# Altium PCB Hi-V H-Bridge v0.1.0.PCBDOC
Units mm, origin at the board's own origin, x right, y up, seen from the top; angles counter-clockwise.
Board outline 152.4 x 152.4 mm, 2 copper layers (Top Layer, Bottom Layer); 84 components, 9 nets, 144 pads, 0 vias.
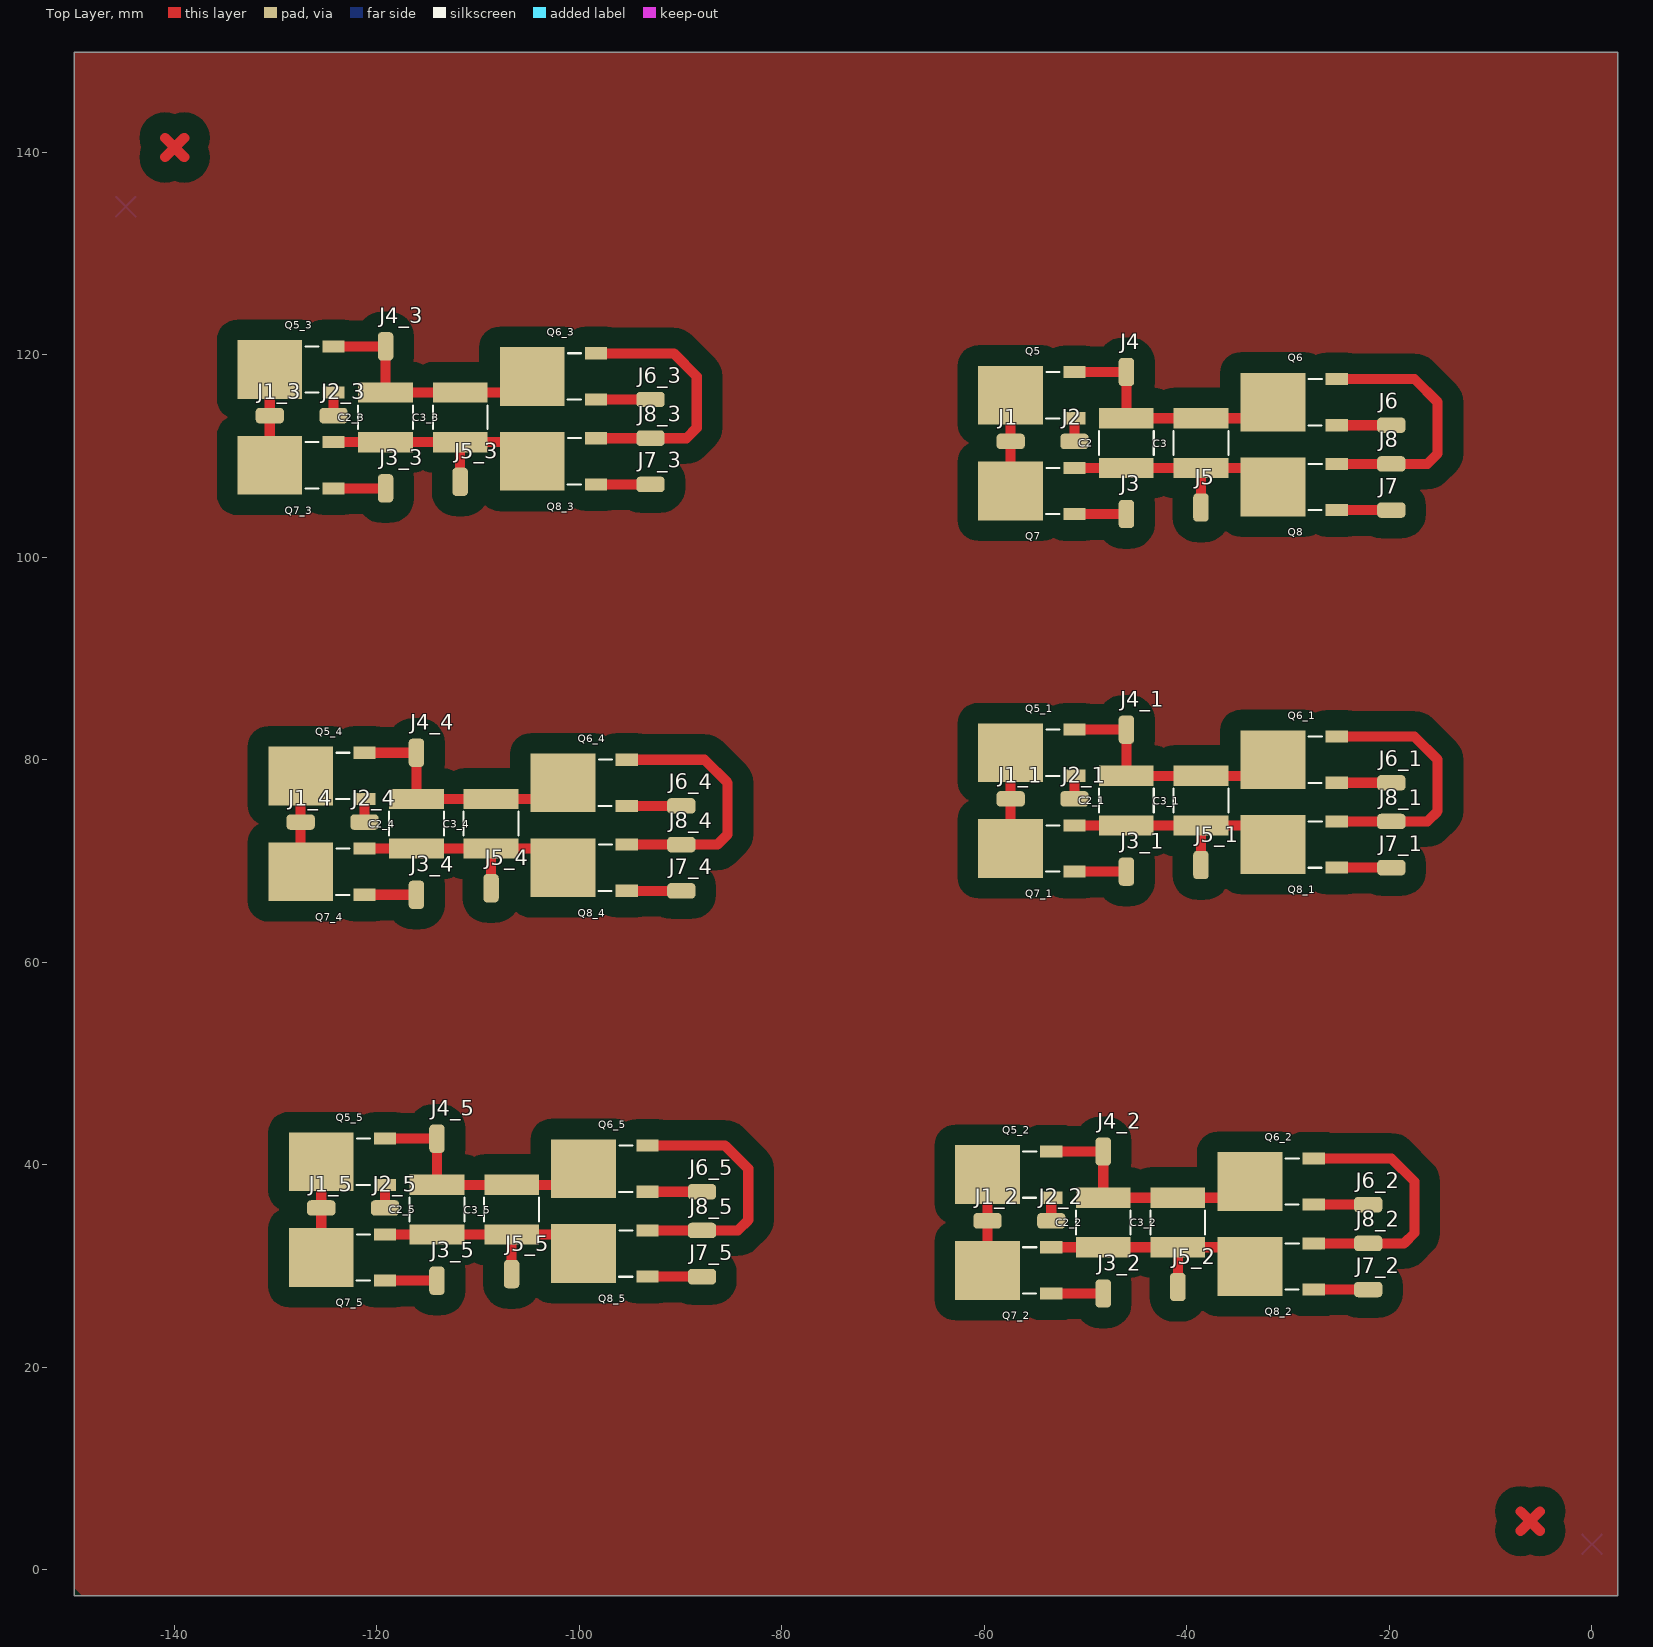
[diagram p0: Top Layer view]
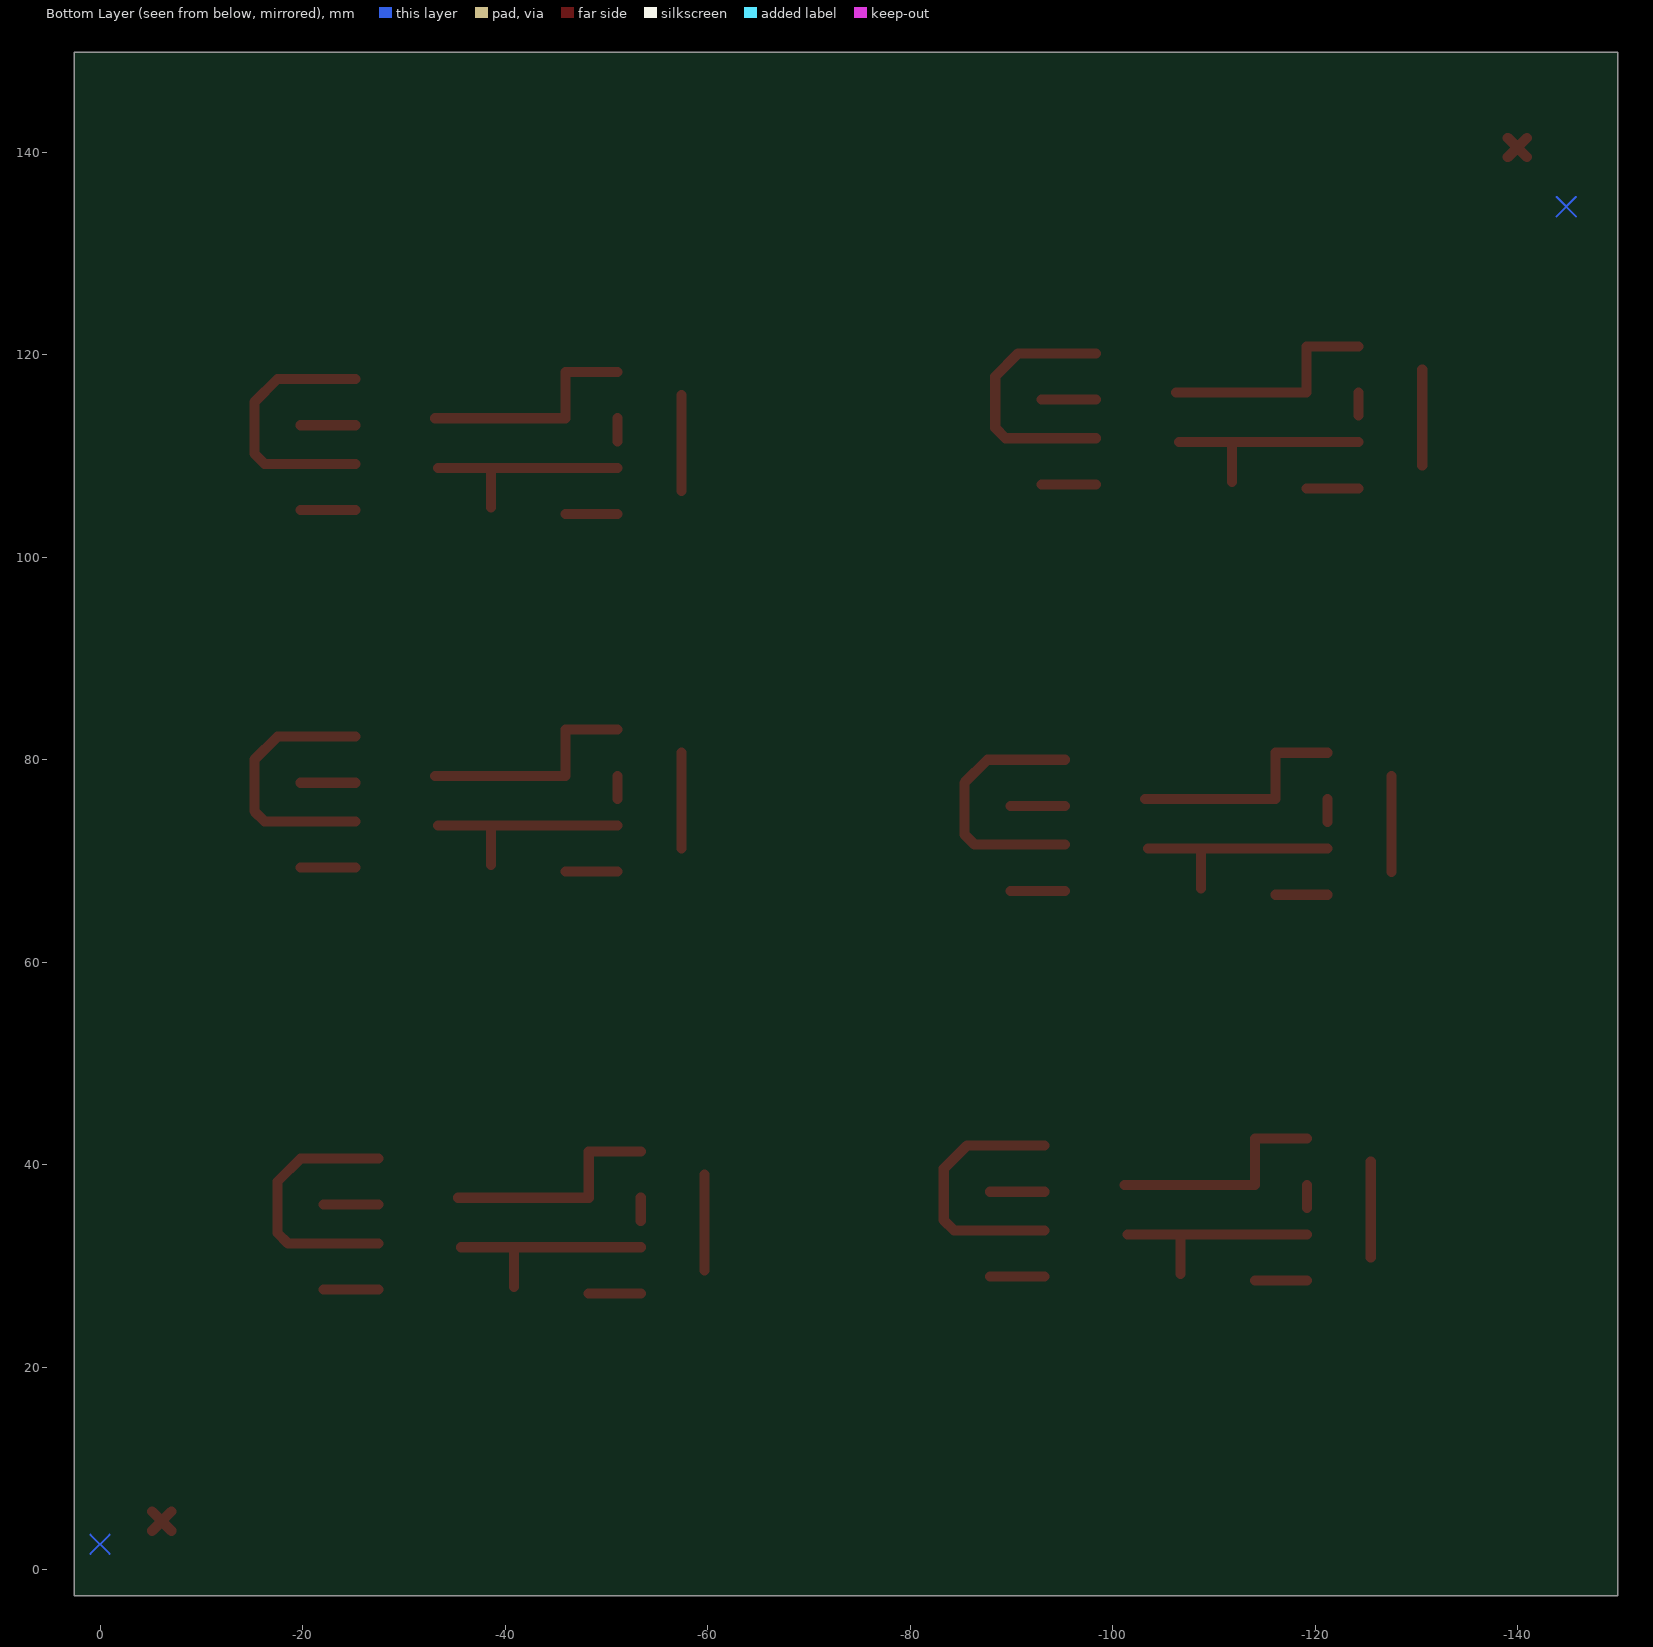
[diagram p1: Bottom Layer view, seen from below]
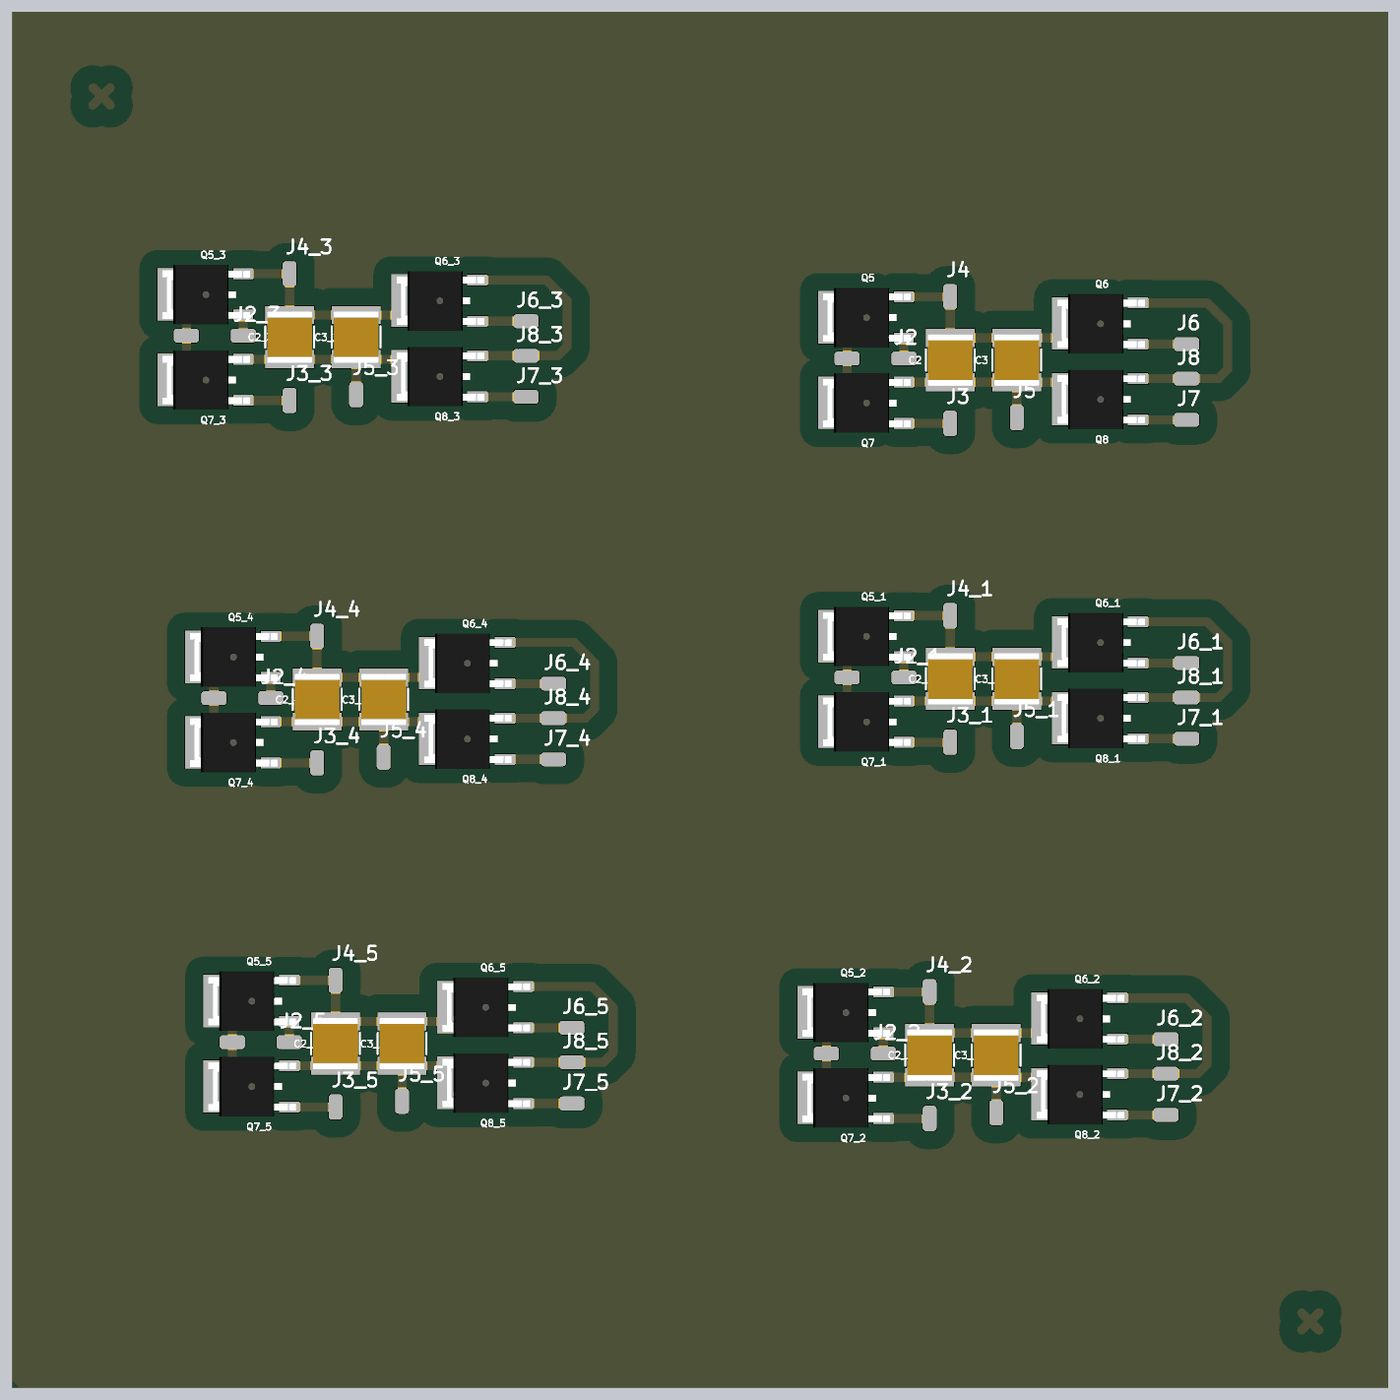
[diagram p2: 3D render of the assembled board from above, using the file's embedded part models]

## Layer stack, top to bottom
Top Solder: solder mask 0.0102, Solder Resist, Dk 3.5
Top Layer: signal copper 0.0356
Dielectric1: core 0.32, FR-4, Dk 4.8
Bottom Layer: signal copper 0.0356
Bottom Solder: solder mask 0.0102, Solder Resist, Dk 3.5

## Board outline
-149.86,-2.54 -149.86,149.86 2.54,149.86 2.54,-2.54

## Design rules (kind name [scope] priority, off if disabled: settings)
AssemblyTestpoint [All] p1: testpointundercomponent=TRUE minsize=1.016 maxsize=2.54 preferedsize=1.524 minholesize=0 maxholesize=1.016 preferedholesize=0.813 testpointgrid=0.025 usegrid=FALSE gridtolerance=0 allowsidebottom=TRUE
Clearance "Clearance Grounds" [InNetClass('Grounds') vs InNetClass('Grounds')] p1: gap=-0.025 ignorepadtopadclearanceinfootprint=FALSE except(0: Arc-Hole Track-Hole SMDPad-Hole THPad-Hole Via-Hole Fill-Hole Poly-Hole Region-Hole Text-Hole)
Clearance "High Voltage (171-250V) Clearance" [InNetClass('171-250V')] p2: gap=2 ignorepadtopadclearanceinfootprint=FALSE
Clearance "Tracks -VT1.P" [InNet('-VT1.P') vs InNet('NetC15A_2')          or InNet('NetNetTie9_1')] p3: gap=-0.025 ignorepadtopadclearanceinfootprint=FALSE except(0: Arc-Hole Track-Hole SMDPad-Hole THPad-Hole Via-Hole Fill-Hole Poly-Hole Region-Hole Text-Hole)
Clearance NetTie3 [InNet('NetNetTie3_1') vs InNet('NetNetTie3_2')] p4: gap=-0.025 ignorepadtopadclearanceinfootprint=FALSE except(0: Arc-Hole Track-Hole SMDPad-Hole THPad-Hole Via-Hole Fill-Hole Poly-Hole Region-Hole Text-Hole)
Clearance NetTie5 [InNet('NetNetTie5_1') vs InNet('NetNetTie5_2')] p5: gap=-0.025 ignorepadtopadclearanceinfootprint=FALSE except(0: Arc-Hole Track-Hole SMDPad-Hole THPad-Hole Via-Hole Fill-Hole Poly-Hole Region-Hole Text-Hole)
Clearance "Tracks +VT1.P" [InNet('+VT1.P') vs InNet('NetC15b_2')  or InNet('NetNetTie8_1')] p6: gap=-0.025 ignorepadtopadclearanceinfootprint=FALSE except(0: Arc-Hole Track-Hole SMDPad-Hole THPad-Hole Via-Hole Fill-Hole Poly-Hole Region-Hole Text-Hole)
Clearance "Tracks -DC Bus" [InNet('-DC BUS') vs InNet('NetNetTie6_1')] p7: gap=-0.025 ignorepadtopadclearanceinfootprint=FALSE except(0: Arc-Hole Track-Hole SMDPad-Hole THPad-Hole Via-Hole Fill-Hole Poly-Hole Region-Hole Text-Hole)
Clearance "Tracks +Vsolar" [InNet('+VSOLAR') vs InNet('NetNetTie7_1')] p8: gap=-0.025 ignorepadtopadclearanceinfootprint=FALSE except(0: Arc-Hole Track-Hole SMDPad-Hole THPad-Hole Via-Hole Fill-Hole Poly-Hole Region-Hole Text-Hole)
Clearance Tracks [All] p9: gap=0.178 ignorepadtopadclearanceinfootprint=FALSE except(0: Arc-Hole Track-Hole SMDPad-Hole THPad-Hole Via-Hole Fill-Hole Poly-Hole Region-Hole Text-Hole)
ComponentClearance "Fiducials and labels" [HasFootprint('Date Code Label') OR HasFootprint('Fiducial - Top Only') or HasFootprint('1 Pin 14-Gauge Wire Connector') OR HasFootprint('1 Pin 22-Gauge Wire Connector')] p1: gap=-25.4 collisioncheckmode=3 verticalgap=0.127 showdistances=TRUE
ComponentClearance Netties [(ObjectKind = 'Component') And (ComponentType = 'Net Tie')] p2: gap=-25.4 collisioncheckmode=3 verticalgap=0.127 showdistances=TRUE
ComponentClearance "Terminal Blocks" [(HasFootprint('TE 796739-2')) vs (HasFootprint('TE 796739-2'))] p3: gap=-25.4 collisioncheckmode=3 verticalgap=0.127 showdistances=TRUE
ComponentClearance [All] p4: gap=0.127 collisioncheckmode=3 verticalgap=0.127 showdistances=TRUE
FabricationTestpoint [All] p1: side=2 testpointundercomponent=TRUE minsize=1.016 maxsize=2.54 preferedsize=1.524 minholesize=0 maxholesize=1.016 preferedholesize=0.813 testpointgrid=0.025 allowsidebottom=TRUE usegrid=FALSE gridtolerance=0
HoleSize "OSH Park Hole Size" [All] p1: absolutevalues=TRUE maxlimit=25.4 minlimit=0.33 maxpercent=80.000 minpercent=20.000
HoleSize "Sunstone Hole Size" [All] p2: absolutevalues=TRUE maxlimit=6.375 minlimit=0.406 maxpercent=80.000 minpercent=20.000
MinimumAnnularRing [All] p1: minimumring=0.127 // OSH Park
MinimumSolderMaskSliver [(InComponentClass('Inside Board Components'))] p1: minsoldermaskwidth=0
PolygonConnect "Hi-Power Polygon" [InNetClass('15A')] p1: connectstyle=Direct reliefconductorwidth=0.254 reliefentries=4 polygonreliefangle="45 Angle" airgapwidth=0.254
PolygonConnect [All] p2: connectstyle=Relief reliefconductorwidth=0.381 reliefentries=4 polygonreliefangle="90 Angle" airgapwidth=0.254
RoomDefinition "High Voltage H-Bridge - Fixed Copy" [InComponentClass('High Voltage H-Bridge - Fixed Copy')] p1: confinementstyle=ConfineIn formatcopy=TRUE lockcomponents=FALSE outline -152.4,-93.617 -152.4,-91.686 -55.734,-91.686 -55.734,-85.829 -13.21,-85.829 -13.21,-87.76 -51.48,-87.76 -51.48,-88.483 -51.48,-93.617 -148.947,-93.617
RoutingPriority Hi-Power [InNetClass('Hi-Power')] p1: routingpriority=0
RoutingPriority "Non-Hi-Power Tracks" [All] p2: routingpriority=1
RoutingTopology "Analog Routing Topology" [InNet('ANALOG GROUND')] p1: topology=Starburst
RoutingTopology [All] p2: topology=Shortest
RoutingVias "Signal/Power Vias" [All] p1: holewidth=0.406 width=0.66 viastyle="Through Hole" minholewidth=0.406 minwidth=0.66 maxholewidth=0.406 maxwidth=0.66
SMDNeckDown SMDNeckDown_1 [InNetClass('Power')] p1: percent=5000.000
SMDNeckDown [InNetClass('Extreme Hi-Power')] p2: percent=5000.000
ShortCircuit "Ground Short Circuit" [InNetClass('Grounds') vs InNetClass('Grounds')] p1: allowed=TRUE
ShortCircuit "ShortCircuit -VT1.P" [InNet('-VT1.P') vs InNet('NetC15A_2')          or InNet('NetNetTie9_1')] p2: allowed=TRUE
ShortCircuit "ShortCircuit NetTie3" [InNet('NetNetTie3_1') vs InNet('NetNetTie3_2')] p3: allowed=TRUE
ShortCircuit "ShortCircuit NetTie5" [InNet('NetNetTie5_1') vs InNet('NetNetTie5_2')] p4: allowed=TRUE
ShortCircuit "ShortCircuit -0V" [InNet('0V') vs InNet('NetNetTie4_1')] p5: allowed=TRUE
ShortCircuit "ShortCircuit +VT1.P" [InNet('+VT1.P') vs InNet('NetC15b_2')  or InNet('NetNetTie8_1')] p6: allowed=TRUE
ShortCircuit "ShortCircuit -DC Bus" [InNet('-DC BUS') vs InNet('NetNetTie6_1')] p7: allowed=TRUE
ShortCircuit "ShortCircuit C_Vs" [InNet('C_VS') vs InNet('NetC15D_2')] p8: allowed=TRUE
ShortCircuit "ShortCircuit D_Vs" [InNet('D_VS') vs InNet('NetC15C_2')] p9: allowed=TRUE
ShortCircuit "ShortCircuit +Vsolar" [InNet('+VSOLAR') vs InNet('NetNetTie7_1')] p10: allowed=TRUE
ShortCircuit [All] p11: allowed=FALSE
SilkToSilkClearance [All] p1: silktosilkclearance=0
SilkToSolderMaskClearance SilkscreenOverComponentPads [IsPad] p1: minsilkscreentomaskgap=0 clearancetoexposedcopper=TRUE
SolderMaskExpansion Vias [IsVia] p1: expansion=-0.051
SolderMaskExpansion "Everything else" [All] p2: expansion=0.102
Width "High Current Width" [InNetClass('15A')] p1: maxlimit=253.975 minlimit=4.191 preferedwidth=8.382
Width "Signal trace width" [All] p2: maxlimit=253.975 minlimit=1 preferedwidth=1 checkconnectedcopper=TRUE
20 further rules are at their usual default settings.

## Classes and differential pairs
net class 171-250V: GND NetC2_1 NetC2_2 NetJ1_1 NetJ2_1 NetJ3_1 NetJ6_1 NetJ7_1 NetJ8_1
component class "High Voltage H-Bridge - Fixed Copy": C2 C3 J1 J2 J3 J4 J5 J6 J7 J8 Q5 Q6 Q7 Q8

## Components (designator, comment, footprint, x,y, rotation, side; value= is the part's Value field where it differs from the comment)
C2 "1uF 2220 450V" "C2220 - CERAMIC" -45.974,111.273 r270 top
C2_1 "1uF 2220 450V" "C2220 - CERAMIC" -45.974,75.967 r270 top (schematic designator C2)
C2_2 "1uF 2220 450V" "C2220 - CERAMIC" -48.26,34.311 r270 top (schematic designator C2)
C2_3 "1uF 2220 450V" "C2220 - CERAMIC" -119.126,113.813 r270 top (schematic designator C2)
C2_4 "1uF 2220 450V" "C2220 - CERAMIC" -116.078,73.681 r270 top (schematic designator C2)
C2_5 "1uF 2220 450V" "C2220 - CERAMIC" -114.046,35.581 r270 top (schematic designator C2)
C3 "1uF 2220 450V" "C2220 - CERAMIC" -38.608,111.273 r270 top
C3_1 "1uF 2220 450V" "C2220 - CERAMIC" -38.608,75.967 r270 top (schematic designator C3)
C3_2 "1uF 2220 450V" "C2220 - CERAMIC" -40.894,34.311 r270 top (schematic designator C3)
C3_3 "1uF 2220 450V" "C2220 - CERAMIC" -111.76,113.813 r270 top (schematic designator C3)
C3_4 "1uF 2220 450V" "C2220 - CERAMIC" -108.712,73.681 r270 top (schematic designator C3)
C3_5 "1uF 2220 450V" "C2220 - CERAMIC" -106.68,35.581 r270 top (schematic designator C3)
J1 "15VDC" "Breadboard Prototype Pin" -57.404,111.438 r90 top
J1_1 "15VDC" "Breadboard Prototype Pin" -57.404,76.132 r90 top (schematic designator J1)
J1_2 "15VDC" "Breadboard Prototype Pin" -59.69,34.476 r90 top (schematic designator J1)
J1_3 "15VDC" "Breadboard Prototype Pin" -130.556,113.978 r90 top (schematic designator J1)
J1_4 "15VDC" "Breadboard Prototype Pin" -127.508,73.846 r90 top (schematic designator J1)
J1_5 "15VDC" "Breadboard Prototype Pin" -125.476,35.746 r90 top (schematic designator J1)
J2 "15VDC" "Breadboard Prototype Pin" -51.104,111.438 r90 top
J2_1 "15VDC" "Breadboard Prototype Pin" -51.104,76.132 r90 top (schematic designator J2)
J2_2 "15VDC" "Breadboard Prototype Pin" -53.39,34.476 r90 top (schematic designator J2)
J2_3 "15VDC" "Breadboard Prototype Pin" -124.256,113.978 r90 top (schematic designator J2)
J2_4 "15VDC" "Breadboard Prototype Pin" -121.208,73.846 r90 top (schematic designator J2)
J2_5 "15VDC" "Breadboard Prototype Pin" -119.176,35.746 r90 top (schematic designator J2)
J3 "15VDC" "Breadboard Prototype Pin" -45.974,104.263 r0 top
J3_1 "15VDC" "Breadboard Prototype Pin" -45.974,68.957 r0 top (schematic designator J3)
J3_2 "15VDC" "Breadboard Prototype Pin" -48.26,27.301 r0 top (schematic designator J3)
J3_3 "15VDC" "Breadboard Prototype Pin" -119.126,106.803 r0 top (schematic designator J3)
J3_4 "15VDC" "Breadboard Prototype Pin" -116.078,66.671 r0 top (schematic designator J3)
J3_5 "15VDC" "Breadboard Prototype Pin" -114.046,28.571 r0 top (schematic designator J3)
J4 "15VDC" "Breadboard Prototype Pin" -45.974,118.283 r0 top
J4_1 "15VDC" "Breadboard Prototype Pin" -45.974,82.977 r0 top (schematic designator J4)
J4_2 "15VDC" "Breadboard Prototype Pin" -48.26,41.321 r0 top (schematic designator J4)
J4_3 "15VDC" "Breadboard Prototype Pin" -119.126,120.823 r0 top (schematic designator J4)
J4_4 "15VDC" "Breadboard Prototype Pin" -116.078,80.691 r0 top (schematic designator J4)
J4_5 "15VDC" "Breadboard Prototype Pin" -114.046,42.591 r0 top (schematic designator J4)
J5 "15VDC" "Breadboard Prototype Pin" -38.608,104.908 r0 top
J5_1 "15VDC" "Breadboard Prototype Pin" -38.608,69.602 r0 top (schematic designator J5)
J5_2 "15VDC" "Breadboard Prototype Pin" -40.894,27.946 r0 top (schematic designator J5)
J5_3 "15VDC" "Breadboard Prototype Pin" -111.76,107.448 r0 top (schematic designator J5)
J5_4 "15VDC" "Breadboard Prototype Pin" -108.712,67.316 r0 top (schematic designator J5)
J5_5 "15VDC" "Breadboard Prototype Pin" -106.68,29.216 r0 top (schematic designator J5)
J6 "15VDC" "Breadboard Prototype Pin" -19.812,113.036 r90 top
J6_1 "15VDC" "Breadboard Prototype Pin" -19.812,77.73 r90 top (schematic designator J6)
J6_2 "15VDC" "Breadboard Prototype Pin" -22.098,36.074 r90 top (schematic designator J6)
J6_3 "15VDC" "Breadboard Prototype Pin" -92.964,115.576 r90 top (schematic designator J6)
J6_4 "15VDC" "Breadboard Prototype Pin" -89.916,75.444 r90 top (schematic designator J6)
J6_5 "15VDC" "Breadboard Prototype Pin" -87.884,37.344 r90 top (schematic designator J6)
J7 "15VDC" "Breadboard Prototype Pin" -19.812,104.654 r90 top
J7_1 "15VDC" "Breadboard Prototype Pin" -19.812,69.348 r90 top (schematic designator J7)
J7_2 "15VDC" "Breadboard Prototype Pin" -22.098,27.692 r90 top (schematic designator J7)
J7_3 "15VDC" "Breadboard Prototype Pin" -92.964,107.194 r90 top (schematic designator J7)
J7_4 "15VDC" "Breadboard Prototype Pin" -89.916,67.062 r90 top (schematic designator J7)
J7_5 "15VDC" "Breadboard Prototype Pin" -87.884,28.962 r90 top (schematic designator J7)
J8 "15VDC" "Breadboard Prototype Pin" -19.812,109.214 r90 top
J8_1 "15VDC" "Breadboard Prototype Pin" -19.812,73.908 r90 top (schematic designator J8)
J8_2 "15VDC" "Breadboard Prototype Pin" -22.098,32.252 r90 top (schematic designator J8)
J8_3 "15VDC" "Breadboard Prototype Pin" -92.964,111.754 r90 top (schematic designator J8)
J8_4 "15VDC" "Breadboard Prototype Pin" -89.916,71.622 r90 top (schematic designator J8)
J8_5 "15VDC" "Breadboard Prototype Pin" -87.884,33.522 r90 top (schematic designator J8)
Q5 "N-MOSFET - 66A/25V" DPAK -57.404,116.003 r90 top
Q5_1 "N-MOSFET - 66A/25V" DPAK -57.404,80.697 r90 top (schematic designator Q5)
Q5_2 "N-MOSFET - 66A/25V" DPAK -59.69,39.041 r90 top (schematic designator Q5)
Q5_3 "N-MOSFET - 66A/25V" DPAK -130.556,118.543 r90 top (schematic designator Q5)
Q5_4 "N-MOSFET - 66A/25V" DPAK -127.508,78.411 r90 top (schematic designator Q5)
Q5_5 "N-MOSFET - 66A/25V" DPAK -125.476,40.311 r90 top (schematic designator Q5)
Q6 "N-MOSFET - 66A/25V" DPAK -31.496,115.316 r90 top
Q6_1 "N-MOSFET - 66A/25V" DPAK -31.496,80.01 r90 top (schematic designator Q6)
Q6_2 "N-MOSFET - 66A/25V" DPAK -33.782,38.354 r90 top (schematic designator Q6)
Q6_3 "N-MOSFET - 66A/25V" DPAK -104.648,117.856 r90 top (schematic designator Q6)
Q6_4 "N-MOSFET - 66A/25V" DPAK -101.6,77.724 r90 top (schematic designator Q6)
Q6_5 "N-MOSFET - 66A/25V" DPAK -99.568,39.624 r90 top (schematic designator Q6)
Q7 "N-MOSFET - 66A/25V" DPAK -57.404,106.543 r90 top
Q7_1 "N-MOSFET - 66A/25V" DPAK -57.404,71.237 r90 top (schematic designator Q7)
Q7_2 "N-MOSFET - 66A/25V" DPAK -59.69,29.581 r90 top (schematic designator Q7)
Q7_3 "N-MOSFET - 66A/25V" DPAK -130.556,109.083 r90 top (schematic designator Q7)
Q7_4 "N-MOSFET - 66A/25V" DPAK -127.508,68.951 r90 top (schematic designator Q7)
Q7_5 "N-MOSFET - 66A/25V" DPAK -125.476,30.851 r90 top (schematic designator Q7)
Q8 "N-MOSFET - 66A/25V" DPAK -31.496,106.934 r90 top
Q8_1 "N-MOSFET - 66A/25V" DPAK -31.496,71.628 r90 top (schematic designator Q8)
Q8_2 "N-MOSFET - 66A/25V" DPAK -33.782,29.972 r90 top (schematic designator Q8)
Q8_3 "N-MOSFET - 66A/25V" DPAK -104.648,109.474 r90 top (schematic designator Q8)
Q8_4 "N-MOSFET - 66A/25V" DPAK -101.6,69.342 r90 top (schematic designator Q8)
Q8_5 "N-MOSFET - 66A/25V" DPAK -99.568,31.242 r90 top (schematic designator Q8)

## Footprints (in the part's own frame and the unit in brackets; to place one, negate y for a bottom-side part, rotate by r counter-clockwise, add the part's x,y. Pads: shape width x height; smd on the part's side, far side on the other; paste and mask are expansions set on the pad)
"Breadboard Prototype Pin" [mm]
  rrect50% 1.53x2.795 smd: 1(0,0)
"C2220 - CERAMIC" [mm] "Chip Capacitor, 2-Leads, Body 5.75x5.00mm, IPC Medium Density"
  rect 2x5.4 smd: 1(-2.45,0) 2(2.45,0)
  silkscreen extent -1.19,-2.7 1.17,2.7, body extent -2.85,-2.5 2.85,2.5, height 2.3
DPAK [mm]
  rect 1.2x2.2 smd: 1(-2.28,-6.3) 3(2.28,-6.3)
  rect 5.8x6.4 smd: 2(0,0)
  silkscreen extent -2.29,-4.83 2.29,-3.51, body extent -3.32,-7.06 3.26,2.64, height 2.3

## Part data
C2 C2_1 C2_2 C2_3 C2_4 C2_5 C3 C3_1 C3_2 C3_3 C3_4 C3_5: Capacitance=1µF, Manufacturer="TDK Corporation", Manufacturer Part Number=CGA9P4X7T2W105M250KE, Operating Temperature="-55°C ~ 125°C", Package / Case=2220, Ratings=AEC-Q200, Supplier Part Number 1=445-7998-1-ND, Temperature Coefficient=X7T, Tolerance=±20%, Voltage - Rated=450V, Applications="Automotive, Boardflex Sensitive", Category=Capacitors, ComponentLink1Description="Spec Sheet", ComponentLink1URL=https://product.tdk.com/info/en/catalog/datasheets/mlcc_automotive_soft_en.pdf, Failure Rate=-, Features="Soft Termination", Height - Seated (Max)=-, Lead Spacing=-, Lead Style=-, Mounting Type="Surface Mount, MLCC", Packaging="Cut Tape (CT)", Part Status=Active, Pricing 1="1=3.11, 10=2.576, 100=2.1589, 250=1.78012 (USD)", RoHS="RoHS Compliant", Size / Dimension="0.224\" L x 0.197\" W (5.70mm x 5.00mm)", Stock 1=10247, Supplier 1=Digi-Key, Thickness (Max)="0.098\" (2.50mm)"
J1 J1_1 J1_2 J1_3 J1_4 J1_5 J2 J2_1 J2_2 J2_3 J2_4 J2_5 J3 J3_1 J3_2 J3_3 J3_4 J3_5 J4 J4_1 J4_2 J4_3 J4_4 J4_5 J5 J5_1 J5_2 J5_3 J5_4 J5_5 J6 J6_1 J6_2 J6_3 J6_4 J6_5 J7 J7_1 J7_2 J7_3 J7_4 J7_5 J8 J8_1 J8_2 J8_3 J8_4 J8_5: library part "1 Pin 22-Gauge Wire connector"
Q5 Q5_1 Q5_2 Q5_3 Q5_4 Q5_5 Q6 Q6_1 Q6_2 Q6_3 Q6_4 Q6_5 Q7 Q7_1 Q7_2 Q7_3 Q7_4 Q7_5 Q8 Q8_1 Q8_2 Q8_3 Q8_4 Q8_5: Current - Continuous Drain (Id) @ 25°C="7.4A (Tc)", Drain to Source Voltage (Vdss)=250V, Drive Voltage (Max Rds On,  Min Rds On)=10V, Input Capacitance (Ciss) (Max) @ Vds="700pF @ 25V", Manufacturer="Fairchild/ON Semiconductor", Manufacturer Part Number=FQD9N25TM, Operating Temperature="-55°C ~ 150°C (TJ)", Package / Case="TO-252-3, DPak (2 Leads + Tab), SC-63", Power Dissipation (Max)="2.5W (Ta), 55W (Tc)", Supplier Device Package=D-Pak, Supplier Part Number 1=FQD9N25TMCT-ND, Category="Discrete Semiconductor Products", ComponentLink1Description="Spec Sheet", ComponentLink1URL=https://www.fairchildsemi.com/datasheets/FQ/FQD9N25.pdf, FET Feature=-, FET Type=N-Channel, Gate Charge (Qg) (Max) @ Vgs="20nC @ 10V", Mounting Type="Surface Mount", Packaging="Cut Tape (CT)", Part Status=Active, Pricing 1="1=0.86, 10=0.766, 100=0.597, 500=0.49316, 1000=0.38934 (USD)", Rds On (Max) @ Id, Vgs="420 mOhm", RoHS="RoHS Compliant", Stock 1=4941, Supplier 1=Digi-Key, Technology="MOSFET (Metal Oxide)", Vgs (Max)=±30V, Vgs(th) (Max) @ Id="5V @ 250µA"

## Nets (pads, with @x,y where several pads share a name; then routed paths per layer and width w, separated by ;. In a path a pad name is that pad's centre, name@x,y a point inside that pad or via, vN(x,y) a via of type N, cw(c..) or ccw(c..) an arc to the next point about the centre after c; other vN are vias at no path point)
GND: 
NetC2_1: C2.1 C3.1 J4.1 Q5.3 Q6.2 | length 22.6
  Top Layer w1: Q5.3 J4.1 C2.1 C3.1 Q6.2@-33.089,113.723
NetC2_2: C2.2 C3.2 J5.1 Q7.3 Q8.2 | length 21.6
  Top Layer w1: Q7.3 C2.2 C3.2 ; J5.1 C3.2 ; Q8.2@-33.385,108.823 C3.2
NetJ1_1: J1.1 Q5.2 Q7.2 | length 9.5
  Top Layer w1: Q7.2 J1.1 Q5.2
NetJ2_1: J2.1 Q5.1 | length 2.3
  Top Layer w1: J2.1 Q5.1
NetJ3_1: J3.1 Q7.1 | length 5.1
  Top Layer w1: Q7.1 J3.1
NetJ6_1: J6.1 Q6.1 | length 5.4
  Top Layer w1: Q6.1 J6.1
NetJ7_1: J7.1 Q8.1 | length 5.4
  Top Layer w1: Q8.1 J7.1
NetJ8_1: J8.1 Q6.3 Q8.3 | length 26.4
  Top Layer w1: Q8.3 J8.1 -16.262,109.214 -15.24,110.236 -15.24,115.316 -17.52,117.596 Q6.3
pads on no net: C2_1.1 C2_1.2 C2_2.1 C2_2.2 C2_3.1 C2_3.2 C2_4.1 C2_4.2 C2_5.1 C2_5.2 C3_1.1 C3_1.2 C3_2.1 C3_2.2 C3_3.1 C3_3.2 C3_4.1 C3_4.2 C3_5.1 C3_5.2 J1_1.1 J1_2.1 J1_3.1 J1_4.1 J1_5.1 J2_1.1 J2_2.1 J2_3.1 J2_4.1 J2_5.1 J3_1.1 J3_2.1 J3_3.1 J3_4.1 J3_5.1 J4_1.1 J4_2.1 J4_3.1 J4_4.1 J4_5.1 J5_1.1 J5_2.1 J5_3.1 J5_4.1 J5_5.1 J6_1.1 J6_2.1 J6_3.1 J6_4.1 J6_5.1 J7_1.1 J7_2.1 J7_3.1 J7_4.1 J7_5.1 J8_1.1 J8_2.1 J8_3.1 J8_4.1 J8_5.1 Q5_1.1 Q5_1.2 Q5_1.3 Q5_2.1 Q5_2.2 Q5_2.3 Q5_3.1 Q5_3.2 Q5_3.3 Q5_4.1 Q5_4.2 Q5_4.3 Q5_5.1 Q5_5.2 Q5_5.3 Q6_1.1 Q6_1.2 Q6_1.3 Q6_2.1 Q6_2.2 Q6_2.3 Q6_3.1 Q6_3.2 Q6_3.3 Q6_4.1 Q6_4.2 Q6_4.3 Q6_5.1 Q6_5.2 Q6_5.3 Q7_1.1 Q7_1.2 Q7_1.3 Q7_2.1 Q7_2.2 Q7_2.3 Q7_3.1 Q7_3.2 Q7_3.3 Q7_4.1 Q7_4.2 Q7_4.3 Q7_5.1 Q7_5.2 Q7_5.3 Q8_1.1 Q8_1.2 Q8_1.3 Q8_2.1 Q8_2.2 Q8_2.3 Q8_3.1 Q8_3.2 Q8_3.3 Q8_4.1 Q8_4.2 Q8_4.3 Q8_5.1 Q8_5.2 Q8_5.3
copper on no net: | length 512.6
  Top Layer w1: -140.906,139.51 -139.001,141.415 ; -140.906,141.415 -139.001,139.51 ; -130.556,109.083 -130.556,113.978 -130.556,118.543 ; -127.508,68.951 -127.508,73.846 -127.508,78.411 ; -125.476,30.851 -125.476,35.746 -125.476,40.311 ; -124.256,106.803 -119.126,106.803 ; -124.256,111.363 -119.126,111.363 -111.76,111.363 ; -124.256,113.978 -124.256,116.263 ; -124.256,120.823 -119.126,120.823 -119.126,116.263 -111.76,116.263 -106.241,116.263 ; -121.208,66.671 -116.078,66.671 ; -121.208,71.231 -116.078,71.231 -108.712,71.231 ; -121.208,73.846 -121.208,76.131 ; -121.208,80.691 -116.078,80.691 -116.078,76.131 -108.712,76.131 -103.193,76.131 ; -119.176,28.571 -114.046,28.571 ; -119.176,33.131 -114.046,33.131 -106.68,33.131 ; -119.176,35.746 -119.176,38.031 ; -119.176,42.591 -114.046,42.591 -114.046,38.031 -106.68,38.031 -101.161,38.031 ; -111.76,107.448 -111.76,111.363 ; -108.712,67.316 -108.712,71.231 ; -106.68,29.216 -106.68,33.131 ; -106.537,111.363 -111.76,111.363 ; -103.489,71.231 -108.712,71.231 ; -101.457,33.131 -106.68,33.131 ; -98.348,107.194 -92.964,107.194 ; -98.348,111.754 -92.964,111.754 -89.414,111.754 -88.392,112.776 -88.392,117.856 -90.672,120.136 -98.348,120.136 ; -98.348,115.576 -92.964,115.576 ; -95.3,67.062 -89.916,67.062 ; -95.3,71.622 -89.916,71.622 -86.366,71.622 -85.344,72.644 -85.344,77.724 -87.624,80.004 -95.3,80.004 ; -95.3,75.444 -89.916,75.444 ; -93.268,28.962 -87.884,28.962 ; -93.268,33.522 -87.884,33.522 -84.334,33.522 -83.312,34.544 -83.312,39.624 -85.592,41.904 -93.268,41.904 ; -93.268,37.344 -87.884,37.344 ; -59.69,29.581 -59.69,34.476 -59.69,39.041 ; -57.404,71.237 -57.404,76.132 -57.404,80.697 ; -53.39,27.301 -48.26,27.301 ; -53.39,31.861 -48.26,31.861 -40.894,31.861 ; -53.39,34.476 -53.39,36.761 ; -53.39,41.321 -48.26,41.321 -48.26,36.761 -40.894,36.761 -35.375,36.761 ; -51.104,68.957 -45.974,68.957 ; -51.104,73.517 -45.974,73.517 -38.608,73.517 ; -51.104,76.132 -51.104,78.417 ; -51.104,82.977 -45.974,82.977 -45.974,78.417 -38.608,78.417 -33.089,78.417 ; -40.894,27.946 -40.894,31.861 ; -38.608,69.602 -38.608,73.517 ; -35.671,31.861 -40.894,31.861 ; -33.385,73.517 -38.608,73.517 ; -27.482,27.692 -22.098,27.692 ; -27.482,32.252 -22.098,32.252 -18.548,32.252 -17.526,33.274 -17.526,38.354 -19.806,40.634 -27.482,40.634 ; -27.482,36.074 -22.098,36.074 ; -25.196,69.348 -19.812,69.348 ; -25.196,73.908 -19.812,73.908 -16.262,73.908 -15.24,74.93 -15.24,80.01 -17.52,82.29 -25.196,82.29 ; -25.196,77.73 -19.812,77.73 ; -7.048,3.873 -5.143,5.779 ; -7.048,5.779 -5.143,3.873
  Bottom Layer w0.2: -145.732,133.667 -143.827,135.572 ; -145.732,135.572 -143.827,133.667 ; -0.953,1.587 0.953,3.492 ; -0.953,3.492 0.953,1.587

## Polygon pours and split planes (outlines as drawn)
GND on Top Layer "gr" (solid, pour order 29): 2.54,149.86 2.54,-2.54 -149.098,-2.54 -149.86,-1.778 -149.86,149.86

## Silkscreen, mask and mechanical layers (free items; w line width, h text height)
Board Outline (M1):
  the board outline again, w0.025
Drill Drawing:
  text ".legend" at 29.21,25.146 h0.76